# EAGLE board SparkFun-OpenPIR-NCS36000_PROTO_Panel_v01 (EAGLE 7.5.0)
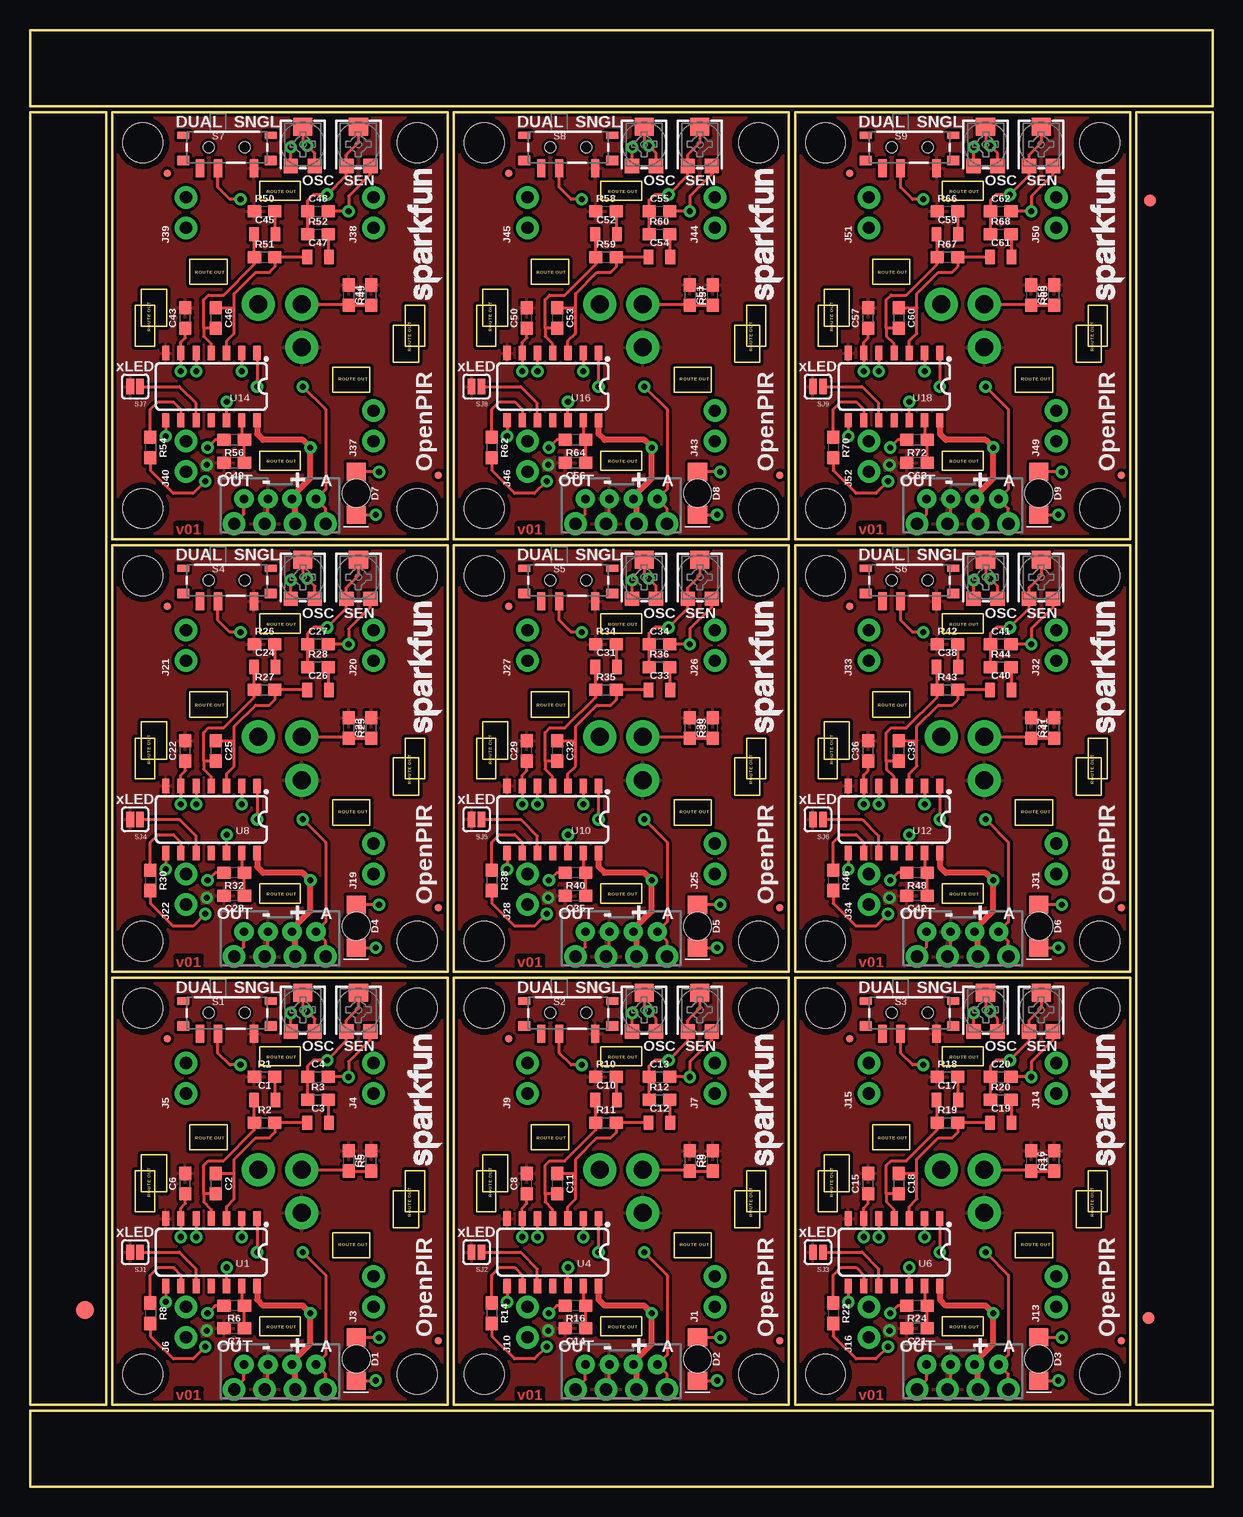
[diagram p0: board, top side]
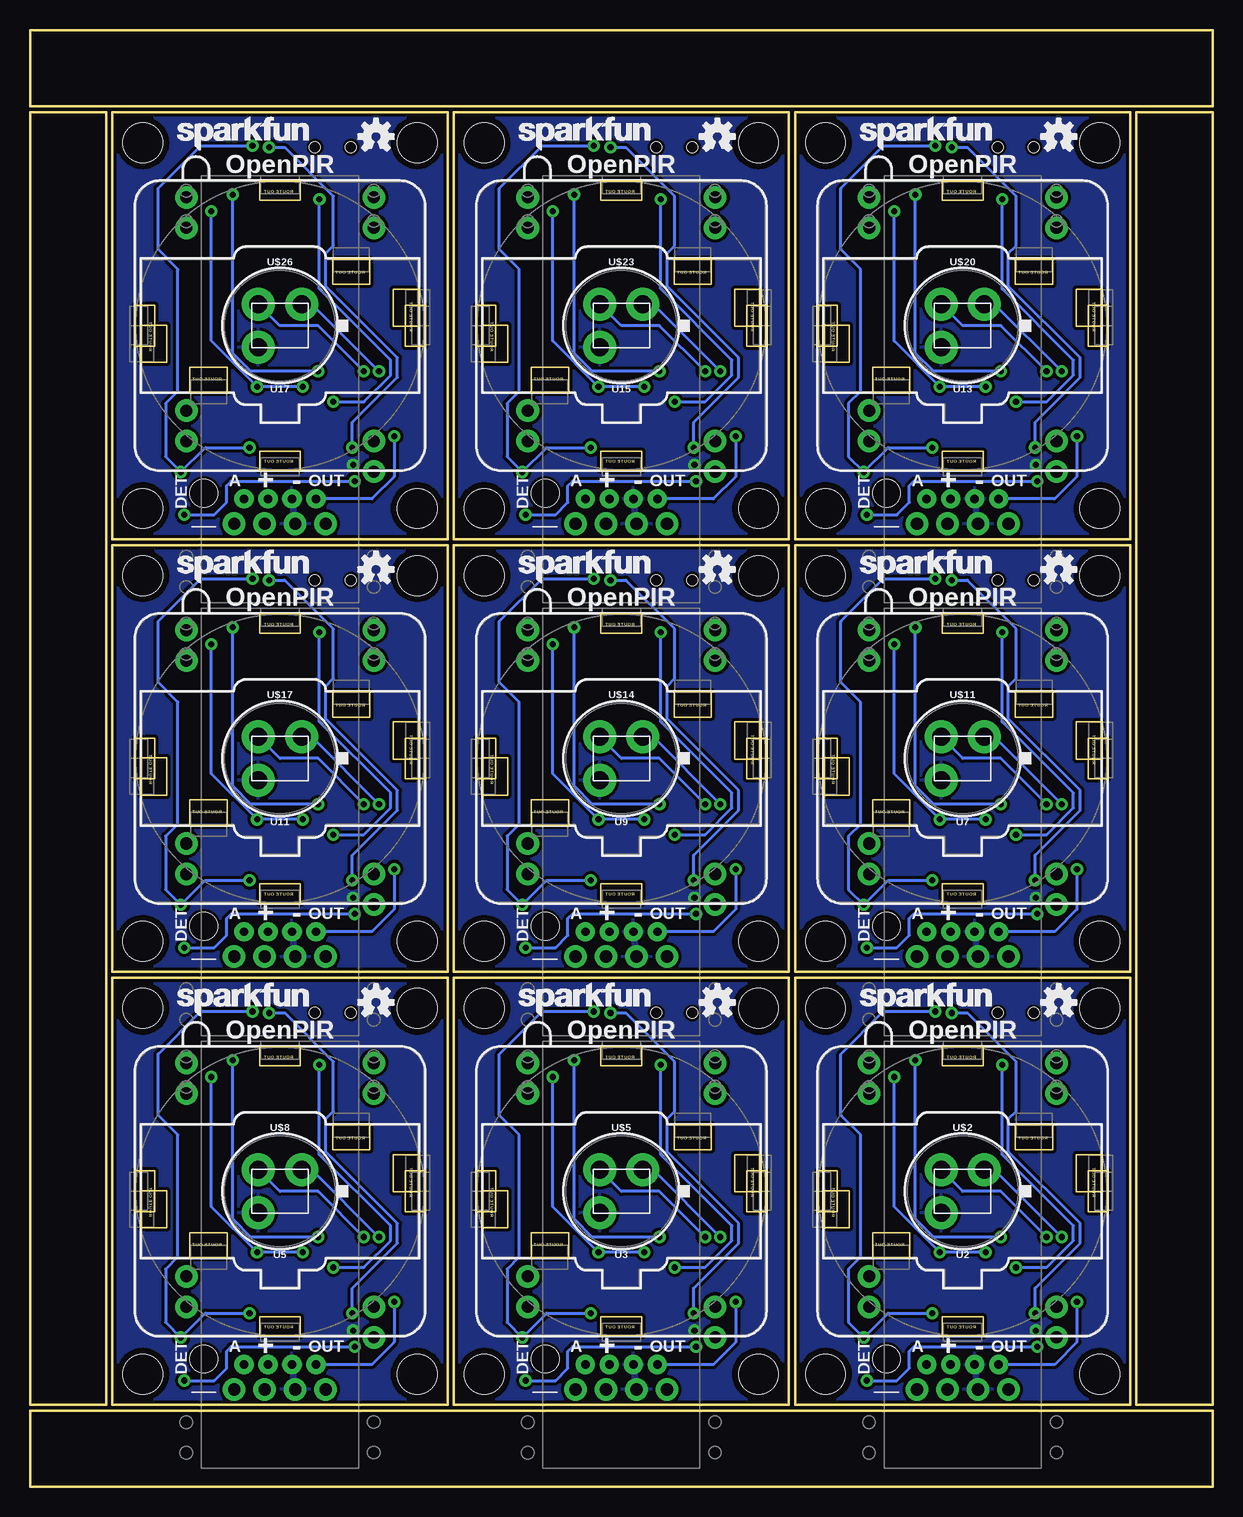
[diagram p1: board, bottom side, seen from below]

Size 98.55 x 121.41 mm. Coordinates in mm from the lower left corner, seen from the top.
Outline: 6.35,79.25 6.35,6.86 0,6.86 0,29.72
Outline: 0,27.18 0,114.55 6.35,114.55 6.35,76.71
Outline: 79.25,0 0,0 0,6.35 29.72,6.35
Outline: 27.18,6.35 98.55,6.35 98.55,0 76.71,0
Outline: 98.55,79.25 98.55,6.86 92.2,6.86 92.2,29.72
Outline: 92.2,27.18 92.2,114.55 98.55,114.55 98.55,76.71
Outline: 79.25,115.06 0,115.06 0,121.41 29.72,121.41
Outline: 27.18,121.41 98.55,121.41 98.55,115.06 76.71,115.06
Outline: 6.86,6.86 6.86,42.42 34.8,42.42 34.8,6.86 6.86,6.86
Outline: 35.31,6.86 35.31,42.42 63.25,42.42 63.25,6.86 35.31,6.86
Outline: 63.75,6.86 63.75,42.42 91.69,42.42 91.69,6.86 63.75,6.86
Outline: 6.86,42.93 6.86,78.49 34.8,78.49 34.8,42.93 6.86,42.93
Outline: 35.31,42.93 35.31,78.49 63.25,78.49 63.25,42.93 35.31,42.93
Outline: 63.75,42.93 63.75,78.49 91.69,78.49 91.69,42.93 63.75,42.93
Outline: 6.86,78.99 6.86,114.55 34.8,114.55 34.8,78.99 6.86,78.99
Outline: 35.31,78.99 35.31,114.55 63.25,114.55 63.25,78.99 35.31,78.99
Outline: 63.75,78.99 63.75,114.55 91.69,114.55 91.69,78.99 63.75,78.99
Copper layers (1*16): Top 0.035mm / dielectric 1.5mm / Bottom 0.035mm
Design rules "SparkFun-2-layer-STANDARD": minimum track width 10mil, minimum drill 20mil, track to track 10mil, track to pad 8mil, pad to pad 8mil, via to via 10mil, smd to smd 8mil, copper to edge 8mil, drill to drill 8mil, minimum pad ring 10mil, minimum via ring 10mil, stop-mask expansion 4mil, vias tented up to drill 25mil, thermal gap 10mil

## Footprints (pad centres in the part's own frame; a part is rotated, then mirrored left to right if it is on the bottom)
0805 = smd 0.8 x 1.2: 1 -0.9,0; 2 0.9,0
0603 = smd 1.1 x 1: 1 -0.85,0; 2 0.85,0
LED-1206-BOTTOM = smd 1.5 x 1.6: A -1.8,0; C 1.8,0 | hole 2.3: 0,0
FIDUCIAL-1.5X3 = smd 1.5 x 1.5: 1 0,0
FIDUCIAL-1X2 = smd 1 x 1: 1 0,0
MICRO-FIDUCIAL = smd 0.635 x 0.635: 1 0,0
STAND-OFF = hole 3.302: 0,0
1X02_NO_SILK = drill 1.016 pad 1.88: 1 0,0; 2 2.54,0
JST-4-PTH-VERT-NS = drill 0.7 pad 1.6: 1 -3,-0.55; 2 -1,-0.55; 3 1,-0.55; 4 3,-0.55
1X04_NO_SILK_ALL_ROUND = drill 1.016 pad 1.88: 1 0,0; 2 2.54,0; 3 5.08,0; 4 7.62,0
TRIMPOT-TC33X = smd 1.2 x 1.2: 1 -1,-1.8; 3 1,-1.8 | smd 1.6 x 1.5: 2 0,1.45
SWITCH-SPST-SMD-A = smd 0.7 x 1.5: 1 -2.25,-1.75; 2 -0.75,-1.75; 3 2.25,-1.75 | smd 1 x 0.6: GND1 -3.65,1; GND3 3.65,1 | smd 1 x 0.8: GND2 -3.65,-1.1; GND4 3.65,-1.1 | hole 0.9: -1.5,0; 1.5,0
SJ_2S = smd 0.635 x 1.27: 1 -0.412,0; 2 0.412,0
SO14 = smd 0.6 x 1.2: 1 -3.81,-2.8; 2 -2.54,-2.8; 3 -1.27,-2.8; 4 0,-2.8; 5 1.27,-2.8; 6 2.54,-2.8; 7 3.81,-2.8; 8 3.81,2.8; 9 2.54,2.8; 10 1.27,2.8; 11 0,2.8; 12 -1.27,2.8; 13 -2.54,2.8; 14 -3.81,2.8
PIR = drill 1.5 pad 2.75: D -1.8,-1.8; G 1.8,1.8; S 1.8,-1.8

## Placement (x,y rotation side)
C1  22uF  [0805]  19.56,32.26 0 top
C2  10nF  [0603]  15.49,25.27 270 top
C3  22uF  [0805]  24,30.35 0 top
C4  10nF  [0603]  24,34.16 0 top
C5  0.1uF  [0603]  28.45,27.18 90 top
C6  0.1uF  [0603]  12.95,25.27 90 top
C7  0.1uF  [0603]  17.02,13.21 180 top
C8  0.1uF  [0603]  41.4,25.27 90 top
C9  0.1uF  [0603]  56.9,27.18 90 top
C10  22uF  [0805]  48.01,32.26 0 top
C11  10nF  [0603]  43.94,25.27 270 top
C12  22uF  [0805]  52.45,30.35 0 top
C13  10nF  [0603]  52.45,34.16 0 top
C14  0.1uF  [0603]  45.47,13.21 180 top
C15  0.1uF  [0603]  69.85,25.27 90 top
C16  0.1uF  [0603]  85.34,27.18 90 top
C17  22uF  [0805]  76.45,32.26 0 top
C18  10nF  [0603]  72.39,25.27 270 top
C19  22uF  [0805]  80.9,30.35 0 top
C20  10nF  [0603]  80.9,34.16 0 top
C21  0.1uF  [0603]  73.91,13.21 180 top
C22  0.1uF  [0603]  12.95,61.34 90 top
C23  0.1uF  [0603]  28.45,63.25 90 top
C24  22uF  [0805]  19.56,68.33 0 top
C25  10nF  [0603]  15.49,61.34 270 top
C26  22uF  [0805]  24,66.42 0 top
C27  10nF  [0603]  24,70.23 0 top
C28  0.1uF  [0603]  17.02,49.28 180 top
C29  0.1uF  [0603]  41.4,61.34 90 top
C30  0.1uF  [0603]  56.9,63.25 90 top
C31  22uF  [0805]  48.01,68.33 0 top
C32  10nF  [0603]  43.94,61.34 270 top
C33  22uF  [0805]  52.45,66.42 0 top
C34  10nF  [0603]  52.45,70.23 0 top
C35  0.1uF  [0603]  45.47,49.28 180 top
C36  0.1uF  [0603]  69.85,61.34 90 top
C37  0.1uF  [0603]  85.34,63.25 90 top
C38  22uF  [0805]  76.45,68.33 0 top
C39  10nF  [0603]  72.39,61.34 270 top
C40  22uF  [0805]  80.9,66.42 0 top
C41  10nF  [0603]  80.9,70.23 0 top
C42  0.1uF  [0603]  73.91,49.28 180 top
C43  0.1uF  [0603]  12.95,97.41 90 top
C44  0.1uF  [0603]  28.45,99.31 90 top
C45  22uF  [0805]  19.56,104.39 0 top
C46  10nF  [0603]  15.49,97.41 270 top
C47  22uF  [0805]  24,102.49 0 top
C48  10nF  [0603]  24,106.3 0 top
C49  0.1uF  [0603]  17.02,85.34 180 top
C50  0.1uF  [0603]  41.4,97.41 90 top
C51  0.1uF  [0603]  56.9,99.31 90 top
C52  22uF  [0805]  48.01,104.39 0 top
C53  10nF  [0603]  43.94,97.41 270 top
C54  22uF  [0805]  52.45,102.49 0 top
C55  10nF  [0603]  52.45,106.3 0 top
C56  0.1uF  [0603]  45.47,85.34 180 top
C57  0.1uF  [0603]  69.85,97.41 90 top
C58  0.1uF  [0603]  85.34,99.31 90 top
C59  22uF  [0805]  76.45,104.39 0 top
C60  10nF  [0603]  72.39,97.41 270 top
C61  22uF  [0805]  80.9,102.49 0 top
C62  10nF  [0603]  80.9,106.3 0 top
C63  0.1uF  [0603]  73.91,85.34 180 top
D1  Green  [LED-1206-BOTTOM]  27.18,10.67 270 top
D2  Green  [LED-1206-BOTTOM]  55.63,10.67 270 top
D3  Green  [LED-1206-BOTTOM]  84.07,10.67 270 top
D4  Green  [LED-1206-BOTTOM]  27.18,46.74 270 top
D5  Green  [LED-1206-BOTTOM]  55.63,46.74 270 top
D6  Green  [LED-1206-BOTTOM]  84.07,46.74 270 top
D7  Green  [LED-1206-BOTTOM]  27.18,82.8 270 top
D8  Green  [LED-1206-BOTTOM]  55.63,82.8 270 top
D9  Green  [LED-1206-BOTTOM]  84.07,82.8 270 top
E$1  [FIDUCIAL-1.5X3]  4.57,14.73 0 top
E$6  [FIDUCIAL-1X2]  93.34,107.19 180 top
E$8  [FIDUCIAL-1X2]  93.22,14.1 90 top
FD1  FIDUCIALUFIDUCIAL  [MICRO-FIDUCIAL]  11.43,37.34 0 top
FD2  FIDUCIALUFIDUCIAL  [MICRO-FIDUCIAL]  34.04,12.19 0 top
FD3  FIDUCIALUFIDUCIAL  [MICRO-FIDUCIAL]  39.88,37.34 0 top
FD4  FIDUCIALUFIDUCIAL  [MICRO-FIDUCIAL]  62.48,12.19 0 top
FD5  FIDUCIALUFIDUCIAL  [MICRO-FIDUCIAL]  68.33,37.34 0 top
FD6  FIDUCIALUFIDUCIAL  [MICRO-FIDUCIAL]  90.93,12.19 0 top
FD7  FIDUCIALUFIDUCIAL  [MICRO-FIDUCIAL]  11.43,73.41 0 top
FD8  FIDUCIALUFIDUCIAL  [MICRO-FIDUCIAL]  34.04,48.26 0 top
FD9  FIDUCIALUFIDUCIAL  [MICRO-FIDUCIAL]  39.88,73.41 0 top
FD10  FIDUCIALUFIDUCIAL  [MICRO-FIDUCIAL]  62.48,48.26 0 top
FD11  FIDUCIALUFIDUCIAL  [MICRO-FIDUCIAL]  68.33,73.41 0 top
FD12  FIDUCIALUFIDUCIAL  [MICRO-FIDUCIAL]  90.93,48.26 0 top
FD13  FIDUCIALUFIDUCIAL  [MICRO-FIDUCIAL]  11.43,109.47 0 top
FD14  FIDUCIALUFIDUCIAL  [MICRO-FIDUCIAL]  34.04,84.33 0 top
FD15  FIDUCIALUFIDUCIAL  [MICRO-FIDUCIAL]  39.88,109.47 0 top
FD16  FIDUCIALUFIDUCIAL  [MICRO-FIDUCIAL]  62.48,84.33 0 top
FD17  FIDUCIALUFIDUCIAL  [MICRO-FIDUCIAL]  68.33,109.47 0 top
FD18  FIDUCIALUFIDUCIAL  [MICRO-FIDUCIAL]  90.93,84.33 0 top
H1  STAND-OFF  [STAND-OFF]  9.4,39.88 0 top
H2  STAND-OFF  [STAND-OFF]  32.26,39.88 0 top
H3  STAND-OFF  [STAND-OFF]  9.4,9.4 0 top
H4  STAND-OFF  [STAND-OFF]  32.26,9.4 0 top
H5  STAND-OFF  [STAND-OFF]  37.85,39.88 0 top
H6  STAND-OFF  [STAND-OFF]  60.71,39.88 0 top
H7  STAND-OFF  [STAND-OFF]  37.85,9.4 0 top
H8  STAND-OFF  [STAND-OFF]  60.71,9.4 0 top
H9  STAND-OFF  [STAND-OFF]  66.29,39.88 0 top
H10  STAND-OFF  [STAND-OFF]  89.15,39.88 0 top
H11  STAND-OFF  [STAND-OFF]  66.29,9.4 0 top
H12  STAND-OFF  [STAND-OFF]  89.15,9.4 0 top
H13  STAND-OFF  [STAND-OFF]  9.4,75.95 0 top
H14  STAND-OFF  [STAND-OFF]  32.26,75.95 0 top
H15  STAND-OFF  [STAND-OFF]  9.4,45.47 0 top
H16  STAND-OFF  [STAND-OFF]  32.26,45.47 0 top
H17  STAND-OFF  [STAND-OFF]  37.85,75.95 0 top
H18  STAND-OFF  [STAND-OFF]  60.71,75.95 0 top
H19  STAND-OFF  [STAND-OFF]  37.85,45.47 0 top
H20  STAND-OFF  [STAND-OFF]  60.71,45.47 0 top
H21  STAND-OFF  [STAND-OFF]  66.29,75.95 0 top
H22  STAND-OFF  [STAND-OFF]  89.15,75.95 0 top
H23  STAND-OFF  [STAND-OFF]  66.29,45.47 0 top
H24  STAND-OFF  [STAND-OFF]  89.15,45.47 0 top
H25  STAND-OFF  [STAND-OFF]  9.4,112.01 0 top
H26  STAND-OFF  [STAND-OFF]  32.26,112.01 0 top
H27  STAND-OFF  [STAND-OFF]  9.4,81.53 0 top
H28  STAND-OFF  [STAND-OFF]  32.26,81.53 0 top
H29  STAND-OFF  [STAND-OFF]  37.85,112.01 0 top
H30  STAND-OFF  [STAND-OFF]  60.71,112.01 0 top
H31  STAND-OFF  [STAND-OFF]  37.85,81.53 0 top
H32  STAND-OFF  [STAND-OFF]  60.71,81.53 0 top
H33  STAND-OFF  [STAND-OFF]  66.29,112.01 0 top
H34  STAND-OFF  [STAND-OFF]  89.15,112.01 0 top
H35  STAND-OFF  [STAND-OFF]  66.29,81.53 0 top
H36  STAND-OFF  [STAND-OFF]  89.15,81.53 0 top
J1  [1X02_NO_SILK]  57.07,15.01 90 top
J2  [JST-4-PTH-VERT-NS]  20.83,9.65 180 top
J3  [1X02_NO_SILK]  28.63,15.01 90 top
J4  [1X02_NO_SILK]  28.63,32.79 90 top
J5  [1X02_NO_SILK]  13,32.79 90 top
J6  [1X02_NO_SILK]  13,12.47 90 top
J7  [1X02_NO_SILK]  57.07,32.79 90 top
J8  [1X04_NO_SILK_ALL_ROUND]  24.64,8.13 180 top
J9  [1X02_NO_SILK]  41.45,32.79 90 top
J10  [1X02_NO_SILK]  41.45,12.47 90 top
J11  [1X04_NO_SILK_ALL_ROUND]  53.09,8.13 180 top
J12  [JST-4-PTH-VERT-NS]  49.28,9.65 180 top
J13  [1X02_NO_SILK]  85.52,15.01 90 top
J14  [1X02_NO_SILK]  85.52,32.79 90 top
J15  [1X02_NO_SILK]  69.9,32.79 90 top
J16  [1X02_NO_SILK]  69.9,12.47 90 top
J17  [1X04_NO_SILK_ALL_ROUND]  81.53,8.13 180 top
J18  [JST-4-PTH-VERT-NS]  77.72,9.65 180 top
J19  [1X02_NO_SILK]  28.63,51.08 90 top
J20  [1X02_NO_SILK]  28.63,68.86 90 top
J21  [1X02_NO_SILK]  13,68.86 90 top
J22  [1X02_NO_SILK]  13,48.54 90 top
J23  [1X04_NO_SILK_ALL_ROUND]  24.64,44.2 180 top
J24  [JST-4-PTH-VERT-NS]  20.83,45.72 180 top
J25  [1X02_NO_SILK]  57.07,51.08 90 top
J26  [1X02_NO_SILK]  57.07,68.86 90 top
J27  [1X02_NO_SILK]  41.45,68.86 90 top
J28  [1X02_NO_SILK]  41.45,48.54 90 top
J29  [1X04_NO_SILK_ALL_ROUND]  53.09,44.2 180 top
J30  [JST-4-PTH-VERT-NS]  49.28,45.72 180 top
J31  [1X02_NO_SILK]  85.52,51.08 90 top
J32  [1X02_NO_SILK]  85.52,68.86 90 top
J33  [1X02_NO_SILK]  69.9,68.86 90 top
J34  [1X02_NO_SILK]  69.9,48.54 90 top
J35  [1X04_NO_SILK_ALL_ROUND]  81.53,44.2 180 top
J36  [JST-4-PTH-VERT-NS]  77.72,45.72 180 top
J37  [1X02_NO_SILK]  28.63,87.15 90 top
J38  [1X02_NO_SILK]  28.63,104.93 90 top
J39  [1X02_NO_SILK]  13,104.93 90 top
J40  [1X02_NO_SILK]  13,84.61 90 top
J41  [1X04_NO_SILK_ALL_ROUND]  24.64,80.26 180 top
J42  [JST-4-PTH-VERT-NS]  20.83,81.79 180 top
J43  [1X02_NO_SILK]  57.07,87.15 90 top
J44  [1X02_NO_SILK]  57.07,104.93 90 top
J45  [1X02_NO_SILK]  41.45,104.93 90 top
J46  [1X02_NO_SILK]  41.45,84.61 90 top
J47  [1X04_NO_SILK_ALL_ROUND]  53.09,80.26 180 top
J48  [JST-4-PTH-VERT-NS]  49.28,81.79 180 top
J49  [1X02_NO_SILK]  85.52,87.15 90 top
J50  [1X02_NO_SILK]  85.52,104.93 90 top
J51  [1X02_NO_SILK]  69.9,104.93 90 top
J52  [1X02_NO_SILK]  69.9,84.61 90 top
J53  [1X04_NO_SILK_ALL_ROUND]  81.53,80.26 180 top
J54  [JST-4-PTH-VERT-NS]  77.72,81.79 180 top
LOGO1  SFE_LOGO_NAME.1_INCH  [SFE_LOGO_NAME_.1]  34.8,26.29 90 top
LOGO2  SFE_LOGO_NAME.1_INCH  [SFE_LOGO_NAME_.1]  63.25,26.29 90 top
LOGO3  SFE_LOGO_NAME.1_INCH  [SFE_LOGO_NAME_.1]  29.84,38.73 0 bottom
LOGO4  OSHW-LOGOS  [OSHW-LOGO-S]  12.83,40.39 0 bottom
LOGO5  SFE_LOGO_NAME.1_INCH  [SFE_LOGO_NAME_.1]  58.29,38.73 0 bottom
LOGO6  OSHW-LOGOS  [OSHW-LOGO-S]  41.27,40.39 0 bottom
LOGO7  SFE_LOGO_NAME.1_INCH  [SFE_LOGO_NAME_.1]  91.69,26.29 90 top
LOGO8  SFE_LOGO_NAME.1_INCH  [SFE_LOGO_NAME_.1]  86.74,38.73 0 bottom
LOGO9  OSHW-LOGOS  [OSHW-LOGO-S]  69.72,40.39 0 bottom
LOGO10  SFE_LOGO_NAME.1_INCH  [SFE_LOGO_NAME_.1]  34.8,62.36 90 top
LOGO11  SFE_LOGO_NAME.1_INCH  [SFE_LOGO_NAME_.1]  29.84,74.8 0 bottom
LOGO12  OSHW-LOGOS  [OSHW-LOGO-S]  12.83,76.45 0 bottom
LOGO13  SFE_LOGO_NAME.1_INCH  [SFE_LOGO_NAME_.1]  63.25,62.36 90 top
LOGO14  SFE_LOGO_NAME.1_INCH  [SFE_LOGO_NAME_.1]  58.29,74.8 0 bottom
LOGO15  OSHW-LOGOS  [OSHW-LOGO-S]  41.27,76.45 0 bottom
LOGO16  SFE_LOGO_NAME.1_INCH  [SFE_LOGO_NAME_.1]  91.69,62.36 90 top
LOGO17  SFE_LOGO_NAME.1_INCH  [SFE_LOGO_NAME_.1]  86.74,74.8 0 bottom
LOGO18  OSHW-LOGOS  [OSHW-LOGO-S]  69.72,76.45 0 bottom
LOGO19  SFE_LOGO_NAME.1_INCH  [SFE_LOGO_NAME_.1]  34.8,98.42 90 top
LOGO20  SFE_LOGO_NAME.1_INCH  [SFE_LOGO_NAME_.1]  29.84,110.87 0 bottom
LOGO21  OSHW-LOGOS  [OSHW-LOGO-S]  12.83,112.52 0 bottom
LOGO22  SFE_LOGO_NAME.1_INCH  [SFE_LOGO_NAME_.1]  63.25,98.42 90 top
LOGO23  SFE_LOGO_NAME.1_INCH  [SFE_LOGO_NAME_.1]  58.29,110.87 0 bottom
LOGO24  OSHW-LOGOS  [OSHW-LOGO-S]  41.27,112.52 0 bottom
LOGO25  SFE_LOGO_NAME.1_INCH  [SFE_LOGO_NAME_.1]  91.69,98.42 90 top
LOGO26  SFE_LOGO_NAME.1_INCH  [SFE_LOGO_NAME_.1]  86.74,110.87 0 bottom
LOGO27  OSHW-LOGOS  [OSHW-LOGO-S]  69.72,112.52 0 bottom
R1  10k  [0603]  19.56,34.16 0 top
R2  560k  [0603]  19.56,30.35 0 top
R3  10k  [0603]  24,32.26 0 top
R4  1M  [TRIMPOT-TC33X]  27.37,39.75 0 top
R5  43k  [0603]  26.54,27.18 270 top
R6  51k  [0603]  17.02,15.11 180 top
R7  1M  [TRIMPOT-TC33X]  22.73,39.75 0 top
R8  1k  [0603]  10.03,14.48 270 top
R9  43k  [0603]  54.99,27.18 270 top
R10  10k  [0603]  48.01,34.16 0 top
R11  560k  [0603]  48.01,30.35 0 top
R12  10k  [0603]  52.45,32.26 0 top
R13  1M  [TRIMPOT-TC33X]  55.82,39.75 0 top
R14  1k  [0603]  38.48,14.48 270 top
R15  1M  [TRIMPOT-TC33X]  51.18,39.75 0 top
R16  51k  [0603]  45.47,15.11 180 top
R17  43k  [0603]  83.44,27.18 270 top
R18  10k  [0603]  76.45,34.16 0 top
R19  560k  [0603]  76.45,30.35 0 top
R20  10k  [0603]  80.9,32.26 0 top
R21  1M  [TRIMPOT-TC33X]  84.26,39.75 0 top
R22  1k  [0603]  66.93,14.48 270 top
R23  1M  [TRIMPOT-TC33X]  79.63,39.75 0 top
R24  51k  [0603]  73.91,15.11 180 top
R25  43k  [0603]  26.54,63.25 270 top
R26  10k  [0603]  19.56,70.23 0 top
R27  560k  [0603]  19.56,66.42 0 top
R28  10k  [0603]  24,68.33 0 top
R29  1M  [TRIMPOT-TC33X]  27.37,75.82 0 top
R30  1k  [0603]  10.03,50.55 270 top
R31  1M  [TRIMPOT-TC33X]  22.73,75.82 0 top
R32  51k  [0603]  17.02,51.18 180 top
R33  43k  [0603]  54.99,63.25 270 top
R34  10k  [0603]  48.01,70.23 0 top
R35  560k  [0603]  48.01,66.42 0 top
R36  10k  [0603]  52.45,68.33 0 top
R37  1M  [TRIMPOT-TC33X]  55.82,75.82 0 top
R38  1k  [0603]  38.48,50.55 270 top
R39  1M  [TRIMPOT-TC33X]  51.18,75.82 0 top
R40  51k  [0603]  45.47,51.18 180 top
R41  43k  [0603]  83.44,63.25 270 top
R42  10k  [0603]  76.45,70.23 0 top
R43  560k  [0603]  76.45,66.42 0 top
R44  10k  [0603]  80.9,68.33 0 top
R45  1M  [TRIMPOT-TC33X]  84.26,75.82 0 top
R46  1k  [0603]  66.93,50.55 270 top
R47  1M  [TRIMPOT-TC33X]  79.63,75.82 0 top
R48  51k  [0603]  73.91,51.18 180 top
R49  43k  [0603]  26.54,99.31 270 top
R50  10k  [0603]  19.56,106.3 0 top
R51  560k  [0603]  19.56,102.49 0 top
R52  10k  [0603]  24,104.39 0 top
R53  1M  [TRIMPOT-TC33X]  27.37,111.89 0 top
R54  1k  [0603]  10.03,86.61 270 top
R55  1M  [TRIMPOT-TC33X]  22.73,111.89 0 top
R56  51k  [0603]  17.02,87.25 180 top
R57  43k  [0603]  54.99,99.31 270 top
R58  10k  [0603]  48.01,106.3 0 top
R59  560k  [0603]  48.01,102.49 0 top
R60  10k  [0603]  52.45,104.39 0 top
R61  1M  [TRIMPOT-TC33X]  55.82,111.89 0 top
R62  1k  [0603]  38.48,86.61 270 top
R63  1M  [TRIMPOT-TC33X]  51.18,111.89 0 top
R64  51k  [0603]  45.47,87.25 180 top
R65  43k  [0603]  83.44,99.31 270 top
R66  10k  [0603]  76.45,106.3 0 top
R67  560k  [0603]  76.45,102.49 0 top
R68  10k  [0603]  80.9,104.39 0 top
R69  1M  [TRIMPOT-TC33X]  84.26,111.89 0 top
R70  1k  [0603]  66.93,86.61 270 top
R71  1M  [TRIMPOT-TC33X]  79.63,111.89 0 top
R72  51k  [0603]  73.91,87.25 180 top
S1  [SWITCH-SPST-SMD-A]  16.41,39.5 0 top
S2  [SWITCH-SPST-SMD-A]  44.86,39.5 0 top
S3  [SWITCH-SPST-SMD-A]  73.3,39.5 0 top
S4  [SWITCH-SPST-SMD-A]  16.41,75.56 0 top
S5  [SWITCH-SPST-SMD-A]  44.86,75.56 0 top
S6  [SWITCH-SPST-SMD-A]  73.3,75.56 0 top
S7  [SWITCH-SPST-SMD-A]  16.41,111.63 0 top
S8  [SWITCH-SPST-SMD-A]  44.86,111.63 0 top
S9  [SWITCH-SPST-SMD-A]  73.3,111.63 0 top
SJ1  LED-EN  [SJ_2S]  8.76,19.56 180 top
SJ2  LED-EN  [SJ_2S]  37.21,19.56 180 top
SJ3  LED-EN  [SJ_2S]  65.66,19.56 180 top
SJ4  LED-EN  [SJ_2S]  8.76,55.63 180 top
SJ5  LED-EN  [SJ_2S]  37.21,55.63 180 top
SJ6  LED-EN  [SJ_2S]  65.66,55.63 180 top
SJ7  LED-EN  [SJ_2S]  8.76,91.69 180 top
SJ8  LED-EN  [SJ_2S]  37.21,91.69 180 top
SJ9  LED-EN  [SJ_2S]  65.66,91.69 180 top
U1  NCS36000  [SO14]  15.11,19.56 180 top
U2  PIR  [PIR]  20.83,24.64 180 bottom
U3  PIR  [PIR]  49.28,24.64 180 bottom
U4  NCS36000  [SO14]  43.56,19.56 180 top
U5  PIR  [PIR]  77.72,24.64 180 bottom
U6  NCS36000  [SO14]  72.01,19.56 180 top
U7  PIR  [PIR]  20.83,60.71 180 bottom
U8  NCS36000  [SO14]  15.11,55.63 180 top
U9  PIR  [PIR]  49.28,60.71 180 bottom
U10  NCS36000  [SO14]  43.56,55.63 180 top
U11  PIR  [PIR]  77.72,60.71 180 bottom
U12  NCS36000  [SO14]  72.01,55.63 180 top
U13  PIR  [PIR]  20.83,96.77 180 bottom
U14  NCS36000  [SO14]  15.11,91.69 180 top
U15  PIR  [PIR]  49.28,96.77 180 bottom
U16  NCS36000  [SO14]  43.56,91.69 180 top
U17  PIR  [PIR]  77.72,96.77 180 bottom
U18  NCS36000  [SO14]  72.01,91.69 180 top
U$1  CWM 0.5 GI V1  [LENS-CWM-0.5-GI-V1]  20.83,24.64 0 bottom
U$2  AA 0.9 GI T1  [LENS-AA-0.9-GI-T1]  20.83,24.64 0 bottom
U$3  NCL-11  [LENS-NCL-11]  20.83,24.64 0 bottom
U$4  CWM 0.5 GI V1  [LENS-CWM-0.5-GI-V1]  49.28,24.64 0 bottom
U$5  AA 0.9 GI T1  [LENS-AA-0.9-GI-T1]  49.28,24.64 0 bottom
U$6  NCL-11  [LENS-NCL-11]  49.28,24.64 0 bottom
U$7  CWM 0.5 GI V1  [LENS-CWM-0.5-GI-V1]  77.72,24.64 0 bottom
U$8  AA 0.9 GI T1  [LENS-AA-0.9-GI-T1]  77.72,24.64 0 bottom
U$9  NCL-11  [LENS-NCL-11]  77.72,24.64 0 bottom
U$10  CWM 0.5 GI V1  [LENS-CWM-0.5-GI-V1]  20.83,60.71 0 bottom
U$11  AA 0.9 GI T1  [LENS-AA-0.9-GI-T1]  20.83,60.71 0 bottom
U$12  NCL-11  [LENS-NCL-11]  20.83,60.71 0 bottom
U$13  CWM 0.5 GI V1  [LENS-CWM-0.5-GI-V1]  49.28,60.71 0 bottom
U$14  AA 0.9 GI T1  [LENS-AA-0.9-GI-T1]  49.28,60.71 0 bottom
U$15  NCL-11  [LENS-NCL-11]  49.28,60.71 0 bottom
U$16  CWM 0.5 GI V1  [LENS-CWM-0.5-GI-V1]  77.72,60.71 0 bottom
U$17  AA 0.9 GI T1  [LENS-AA-0.9-GI-T1]  77.72,60.71 0 bottom
U$18  NCL-11  [LENS-NCL-11]  77.72,60.71 0 bottom
U$19  CWM 0.5 GI V1  [LENS-CWM-0.5-GI-V1]  20.83,96.77 0 bottom
U$20  AA 0.9 GI T1  [LENS-AA-0.9-GI-T1]  20.83,96.77 0 bottom
U$21  NCL-11  [LENS-NCL-11]  20.83,96.77 0 bottom
U$22  CWM 0.5 GI V1  [LENS-CWM-0.5-GI-V1]  49.28,96.77 0 bottom
U$23  AA 0.9 GI T1  [LENS-AA-0.9-GI-T1]  49.28,96.77 0 bottom
U$24  NCL-11  [LENS-NCL-11]  49.28,96.77 0 bottom
U$25  CWM 0.5 GI V1  [LENS-CWM-0.5-GI-V1]  77.72,96.77 0 bottom
U$26  AA 0.9 GI T1  [LENS-AA-0.9-GI-T1]  77.72,96.77 0 bottom
U$27  NCL-11  [LENS-NCL-11]  77.72,96.77 0 bottom

## Library data of the parts
C1 C3 C10 C12 C17 C19 C24 C26 C31 C33 C38 C40 C45 C47 C52 C54 C59 C61 = SparkFun-Capacitors; PROD_ID: CAP-08402
C2 C4 C11 C13 C18 C20 C25 C27 C32 C34 C39 C41 C46 C48 C53 C55 C60 C62 = SparkFun-Capacitors; PROD_ID: CAP-00867
C5-C9 C14-C16 C21-C23 C28-C30 C35-C37 C42-C44 C49-C51 C56-C58 C63 = SparkFun-Capacitors; PROD_ID: CAP-00810
D1-D9 = SparkFun-LED; PROD_ID: DIO-11076
E$1 SJ1-SJ9 = SparkFun-Retired
E$6 E$8 FD1-FD18 LOGO1-LOGO27 = SparkFun-Aesthetics
H1-H36 = SparkFun-Electromechanical
J1 J3-J7 J9 J10 J13-J16 J19-J22 J25-J28 J31-J34 J37-J40 J43-J46 J49-J52 = SparkFun-Connectors
J2 J12 J18 J24 J30 J36 J42 J48 J54 U$1-U$27 = openPIR-temp
J8 J11 J17 J23 J29 J35 J41 J47 J53 = SparkFun-Connectors; PROD_ID: CONN-09696
R1 R3 R10 R12 R18 R20 R26 R28 R34 R36 R42 R44 R50 R52 R58 R60 R66 R68 = SparkFun-Resistors; PROD_ID: RES-00824
R2 R11 R19 R27 R35 R43 R51 R59 R67 = openPIR-temp; PROD_ID: RES-10301
R4 R7 R13 R15 R21 R23 R29 R31 R37 R39 R45 R47 R53 R55 R61 R63 R69 R71 = openPIR-temp; PROD_ID: RES-13431
R5 R9 R17 R25 R33 R41 R49 R57 R65 = SparkFun-Resistors; PROD_ID: RES-07858
R6 R16 R24 R32 R40 R48 R56 R64 R72 = openPIR-temp; PROD_ID: RES-08495
R8 R14 R22 R30 R38 R46 R54 R62 R70 = SparkFun-Resistors; PROD_ID: RES-07856
S1-S9 = SparkFun-Electromechanical; PROD_ID: SWCH-10651
U1 U4 U6 U8 U10 U12 U14 U16 U18 = openPIR-temp; PROD_ID: IC-13432
U2 U3 U5 U7 U9 U11 U13 U15 U17 = openPIR-temp; PROD_ID: IC-13430

## Nets
!LED_EN!: SJ1.1 U1.10
!LED_EN!1: SJ2.1 U4.10
!LED_EN!2: SJ3.1 U6.10
!LED_EN!3: SJ4.1 U8.10
!LED_EN!4: SJ5.1 U10.10
!LED_EN!5: SJ6.1 U12.10
!LED_EN!6: SJ7.1 U14.10
!LED_EN!7: SJ8.1 U16.10
!LED_EN!8: SJ9.1 U18.10
A_OUT: C4.2 J2.1 J8.1 R4.3 U1.1
A_OUT1: C13.2 J11.1 J12.1 R13.3 U4.1
A_OUT2: C20.2 J17.1 J18.1 R21.3 U6.1
A_OUT3: C27.2 J23.1 J24.1 R29.3 U8.1
A_OUT4: C34.2 J29.1 J30.1 R37.3 U10.1
A_OUT5: C41.2 J35.1 J36.1 R45.3 U12.1
A_OUT6: C48.2 J41.1 J42.1 R53.3 U14.1
A_OUT7: C55.2 J47.1 J48.1 R61.3 U16.1
A_OUT8: C62.2 J53.1 J54.1 R69.3 U18.1
GND: C5.2 C6.2 C7.2 J2.3 J8.3 R1.1 R5.1 S1.3 SJ1.2 U1.7 U2.G
GND1: C8.2 C9.2 C14.2 J11.3 J12.3 R9.1 R10.1 S2.3 SJ2.2 U3.G U4.7
GND2: C15.2 C16.2 C21.2 J17.3 J18.3 R17.1 R18.1 S3.3 SJ3.2 U5.G U6.7
GND3: C22.2 C23.2 C28.2 J23.3 J24.3 R25.1 R26.1 S4.3 SJ4.2 U7.G U8.7
GND4: C29.2 C30.2 C35.2 J29.3 J30.3 R33.1 R34.1 S5.3 SJ5.2 U9.G U10.7
GND5: C36.2 C37.2 C42.2 J35.3 J36.3 R41.1 R42.1 S6.3 SJ6.2 U11.G U12.7
GND6: C43.2 C44.2 C49.2 J41.3 J42.3 R49.1 R50.1 S7.3 SJ7.2 U13.G U14.7
GND7: C50.2 C51.2 C56.2 J47.3 J48.3 R57.1 R58.1 S8.3 SJ8.2 U15.G U16.7
GND8: C57.2 C58.2 C63.2 J53.3 J54.3 R65.1 R66.1 S9.3 SJ9.2 U17.G U18.7
LED: R8.1 U1.9
LED1: R14.1 U4.9
LED2: R22.1 U6.9
LED3: R30.1 U8.9
LED4: R38.1 U10.9
LED5: R46.1 U12.9
LED6: R54.1 U14.9
LED7: R62.1 U16.9
LED8: R70.1 U18.9
MODE: S1.2 U1.12
MODE1: S2.2 U4.12
MODE2: S3.2 U6.12
MODE3: S4.2 U8.12
MODE4: S5.2 U10.12
MODE5: S6.2 U12.12
MODE6: S7.2 U14.12
MODE7: S8.2 U16.12
MODE8: S9.2 U18.12
N$1: C5.1 R5.2 U1.5 U2.S
N$2: C6.1 U1.6 U2.D
N$3: C1.2 R1.2
N$4: C3.2 R3.2
N$5: C1.1 C2.2 R2.1 U1.4
N$6: C2.1 C3.1 R2.2 U1.3
N$7: C4.1 R3.1 R4.1 R4.2 U1.2
N$8: C7.1 R6.1 U1.13
N$9: D1.C R8.2
N$10: C8.1 U3.D U4.6
N$11: R6.2 R7.1
N$12: C9.1 R9.2 U3.S U4.5
N$13: C10.2 R10.2
N$14: C12.2 R12.2
N$15: C10.1 C11.2 R11.1 U4.4
N$16: C11.1 C12.1 R11.2 U4.3
N$17: C13.1 R12.1 R13.1 R13.2 U4.2
N$18: C14.1 R16.1 U4.13
N$19: D2.C R14.2
N$20: R15.1 R16.2
N$21: C15.1 U5.D U6.6
N$22: C16.1 R17.2 U5.S U6.5
N$23: C17.2 R18.2
N$24: C19.2 R20.2
N$25: C17.1 C18.2 R19.1 U6.4
N$26: C18.1 C19.1 R19.2 U6.3
N$27: C20.1 R20.1 R21.1 R21.2 U6.2
N$28: C21.1 R24.1 U6.13
N$29: D3.C R22.2
N$30: R23.1 R24.2
N$31: C22.1 U7.D U8.6
N$32: C23.1 R25.2 U7.S U8.5
N$33: C24.2 R26.2
N$34: C26.2 R28.2
N$35: C24.1 C25.2 R27.1 U8.4
N$36: C25.1 C26.1 R27.2 U8.3
N$37: C27.1 R28.1 R29.1 R29.2 U8.2
N$38: C28.1 R32.1 U8.13
N$39: D4.C R30.2
N$40: R31.1 R32.2
N$41: C29.1 U9.D U10.6
N$42: C30.1 R33.2 U9.S U10.5
N$43: C31.2 R34.2
N$44: C33.2 R36.2
N$45: C31.1 C32.2 R35.1 U10.4
N$46: C32.1 C33.1 R35.2 U10.3
N$47: C34.1 R36.1 R37.1 R37.2 U10.2
N$48: C35.1 R40.1 U10.13
N$49: D5.C R38.2
N$50: R39.1 R40.2
N$51: C36.1 U11.D U12.6
N$52: C37.1 R41.2 U11.S U12.5
N$53: C38.2 R42.2
N$54: C40.2 R44.2
N$55: C38.1 C39.2 R43.1 U12.4
N$56: C39.1 C40.1 R43.2 U12.3
N$57: C41.1 R44.1 R45.1 R45.2 U12.2
N$58: C42.1 R48.1 U12.13
N$59: D6.C R46.2
N$60: R47.1 R48.2
N$61: C43.1 U13.D U14.6
N$62: C44.1 R49.2 U13.S U14.5
N$63: C45.2 R50.2
N$64: C47.2 R52.2
N$65: C45.1 C46.2 R51.1 U14.4
N$66: C46.1 C47.1 R51.2 U14.3
N$67: C48.1 R52.1 R53.1 R53.2 U14.2
N$68: C49.1 R56.1 U14.13
N$69: D7.C R54.2
N$70: R55.1 R56.2
N$71: C50.1 U15.D U16.6
N$72: C51.1 R57.2 U15.S U16.5
N$73: C52.2 R58.2
N$74: C54.2 R60.2
N$75: C52.1 C53.2 R59.1 U16.4
N$76: C53.1 C54.1 R59.2 U16.3
N$77: C55.1 R60.1 R61.1 R61.2 U16.2
N$78: C56.1 R64.1 U16.13
N$79: D8.C R62.2
N$80: R63.1 R64.2
N$81: C57.1 U17.D U18.6
N$82: C58.1 R65.2 U17.S U18.5
N$83: C59.2 R66.2
N$84: C61.2 R68.2
N$85: C59.1 C60.2 R67.1 U18.4
N$86: C60.1 C61.1 R67.2 U18.3
N$87: C62.1 R68.1 R69.1 R69.2 U18.2
N$88: C63.1 R72.1 U18.13
N$89: D9.C R70.2
N$90: R71.1 R72.2
OUT: J2.4 J8.4 U1.8
OUT1: J11.4 J12.4 U4.8
OUT2: J17.4 J18.4 U6.8
OUT3: J23.4 J24.4 U8.8
OUT4: J29.4 J30.4 U10.8
OUT5: J35.4 J36.4 U12.8
OUT6: J41.4 J42.4 U14.8
OUT7: J47.4 J48.4 U16.8
OUT8: J53.4 J54.4 U18.8
VCC: D1.A J2.2 J8.2 R7.2 R7.3 U1.14
VCC1: D2.A J11.2 J12.2 R15.2 R15.3 U4.14
VCC2: D3.A J17.2 J18.2 R23.2 R23.3 U6.14
VCC3: D4.A J23.2 J24.2 R31.2 R31.3 U8.14
VCC4: D5.A J29.2 J30.2 R39.2 R39.3 U10.14
VCC5: D6.A J35.2 J36.2 R47.2 R47.3 U12.14
VCC6: D7.A J41.2 J42.2 R55.2 R55.3 U14.14
VCC7: D8.A J47.2 J48.2 R63.2 R63.3 U16.14
VCC8: D9.A J53.2 J54.2 R71.2 R71.3 U18.14

## Tracks (layer width: path | path; a pad name or v marks a point on that pad's centre or on a via)
!LED_EN!
  Top 0.254: SJ1.1 12.45,19.56 13.84,18.16 U1.10
!LED_EN!1
  Top 0.254: SJ2.1 40.89,19.56 42.29,18.16 U4.10
!LED_EN!2
  Top 0.254: SJ3.1 69.34,19.56 70.74,18.16 U6.10
!LED_EN!3
  Top 0.254: SJ4.1 12.45,55.63 13.84,54.23 U8.10
!LED_EN!4
  Top 0.254: SJ5.1 40.89,55.63 42.29,54.23 U10.10
!LED_EN!5
  Top 0.254: SJ6.1 69.34,55.63 70.74,54.23 U12.10
!LED_EN!6
  Top 0.254: SJ7.1 12.45,91.69 13.84,90.3 U14.10
!LED_EN!7
  Top 0.254: SJ8.1 40.89,91.69 42.29,90.3 U16.10
!LED_EN!8
  Top 0.254: SJ9.1 69.34,91.69 70.74,90.3 U18.10
A_OUT  (via drill 0.51)
  Top 0.254: U1.1 v18.92,19.56 | C4.2 v26.54,34.16 26.54,35.43 28.37,37.26 R4.3 | v22.73,19.56 24.64,17.65 24.64,11.01 J2.1 24.64,9.39 J8.1
  Bottom 0.254: v18.92,19.56 v22.73,19.56 26.54,23.37 v26.54,34.16
A_OUT1  (via drill 0.51)
  Top 0.254: U4.1 v47.37,19.56 | C13.2 v54.99,34.16 54.99,35.43 56.82,37.26 R13.3 | v51.18,19.56 53.09,17.65 53.09,11.01 J12.1 53.09,9.39 J11.1
  Bottom 0.254: v47.37,19.56 v51.18,19.56 54.99,23.37 v54.99,34.16
A_OUT2  (via drill 0.51)
  Top 0.254: U6.1 v75.82,19.56 | C20.2 v83.44,34.16 83.44,35.43 85.26,37.26 R21.3 | v79.63,19.56 81.53,17.65 81.53,11.01 J18.1 81.53,9.39 J17.1
  Bottom 0.254: v75.82,19.56 v79.63,19.56 83.44,23.37 v83.44,34.16
A_OUT3  (via drill 0.51)
  Top 0.254: U8.1 v18.92,55.63 | C27.2 v26.54,70.23 26.54,71.5 28.37,73.33 R29.3 | v22.73,55.63 24.64,53.72 24.64,47.08 J24.1 24.64,45.46 J23.1
  Bottom 0.254: v18.92,55.63 v22.73,55.63 26.54,59.44 v26.54,70.23
A_OUT4  (via drill 0.51)
  Top 0.254: U10.1 v47.37,55.63 | C34.2 v54.99,70.23 54.99,71.5 56.82,73.33 R37.3 | v51.18,55.63 53.09,53.72 53.09,47.08 J30.1 53.09,45.46 J29.1
  Bottom 0.254: v47.37,55.63 v51.18,55.63 54.99,59.44 v54.99,70.23
A_OUT5  (via drill 0.51)
  Top 0.254: U12.1 v75.82,55.63 | C41.2 v83.44,70.23 83.44,71.5 85.26,73.33 R45.3 | v79.63,55.63 81.53,53.72 81.53,47.08 J36.1 81.53,45.46 J35.1
  Bottom 0.254: v75.82,55.63 v79.63,55.63 83.44,59.44 v83.44,70.23
A_OUT6  (via drill 0.51)
  Top 0.254: U14.1 v18.92,91.69 | C48.2 v26.54,106.3 26.54,107.57 28.37,109.39 R53.3 | v22.73,91.69 24.64,89.79 24.64,83.15 J42.1 24.64,81.53 J41.1
  Bottom 0.254: v18.92,91.69 v22.73,91.69 26.54,95.5 v26.54,106.3
A_OUT7  (via drill 0.51)
  Top 0.254: U16.1 v47.37,91.69 | C55.2 v54.99,106.3 54.99,107.57 56.82,109.39 R61.3 | v51.18,91.69 53.09,89.79 53.09,83.15 J48.1 53.09,81.53 J47.1
  Bottom 0.254: v47.37,91.69 v51.18,91.69 54.99,95.5 v54.99,106.3
A_OUT8  (via drill 0.51)
  Top 0.254: U18.1 v75.82,91.69 | C62.2 v83.44,106.3 83.44,107.57 85.26,109.39 R69.3 | v79.63,91.69 81.53,89.79 81.53,83.15 J54.1 81.53,81.53 J53.1
  Bottom 0.254: v75.82,91.69 v79.63,91.69 83.44,95.5 v83.44,106.3
GND  (via drill 0.51)
  Top 0.254: J8.3 19.83,8.4 J2.3
  other vias: 14.73,13.03
  pour Bottom (isolate 0.254): 34.8,6.86 34.8,42.42 6.86,42.42 6.86,6.86
  pour Top (isolate 0.254): 6.86,6.86 6.86,42.42 34.8,42.42 34.8,6.86
GND1  (via drill 0.51)
  Top 0.254: J11.3 48.28,8.4 J12.3
  other vias: 43.18,13.03
  pour Bottom (isolate 0.254): 63.25,6.86 63.25,42.42 35.31,42.42 35.31,6.86
  pour Top (isolate 0.254): 35.31,6.86 35.31,42.42 63.25,42.42 63.25,6.86
GND2  (via drill 0.51)
  Top 0.254: J17.3 76.72,8.4 J18.3
  other vias: 71.63,13.03
  pour Bottom (isolate 0.254): 91.69,6.86 91.69,42.42 63.75,42.42 63.75,6.86
  pour Top (isolate 0.254): 63.75,6.86 63.75,42.42 91.69,42.42 91.69,6.86
GND3  (via drill 0.51)
  Top 0.254: J23.3 19.83,44.47 J24.3
  other vias: 14.73,49.1
  pour Bottom (isolate 0.254): 34.8,42.93 34.8,78.49 6.86,78.49 6.86,42.93
  pour Top (isolate 0.254): 6.86,42.93 6.86,78.49 34.8,78.49 34.8,42.93
GND4  (via drill 0.51)
  Top 0.254: J29.3 48.28,44.47 J30.3
  other vias: 43.18,49.1
  pour Bottom (isolate 0.254): 63.25,42.93 63.25,78.49 35.31,78.49 35.31,42.93
  pour Top (isolate 0.254): 35.31,42.93 35.31,78.49 63.25,78.49 63.25,42.93
GND5  (via drill 0.51)
  Top 0.254: J35.3 76.72,44.47 J36.3
  other vias: 71.63,49.1
  pour Bottom (isolate 0.254): 91.69,42.93 91.69,78.49 63.75,78.49 63.75,42.93
  pour Top (isolate 0.254): 63.75,42.93 63.75,78.49 91.69,78.49 91.69,42.93
GND6  (via drill 0.51)
  Top 0.254: J41.3 19.83,80.53 J42.3
  other vias: 14.73,85.17
  pour Bottom (isolate 0.254): 34.8,78.99 34.8,114.55 6.86,114.55 6.86,78.99
  pour Top (isolate 0.254): 6.86,78.99 6.86,114.55 34.8,114.55 34.8,78.99
GND7  (via drill 0.51)
  Top 0.254: J47.3 48.28,80.53 J48.3
  other vias: 43.18,85.17
  pour Bottom (isolate 0.254): 63.25,78.99 63.25,114.55 35.31,114.55 35.31,78.99
  pour Top (isolate 0.254): 35.31,78.99 35.31,114.55 63.25,114.55 63.25,78.99
GND8  (via drill 0.51)
  Top 0.254: J53.3 76.72,80.53 J54.3
  other vias: 71.63,85.17
  pour Bottom (isolate 0.254): 91.69,78.99 91.69,114.55 63.75,114.55 63.75,78.99
  pour Top (isolate 0.254): 63.75,78.99 63.75,114.55 91.69,114.55 91.69,78.99
LED
  Top 0.254: R8.1 10.03,17.65 10.67,18.29 11.94,18.29 12.57,17.65 U1.9
LED1
  Top 0.254: R14.1 38.48,17.65 39.12,18.29 40.39,18.29 41.02,17.65 U4.9
LED2
  Top 0.254: R22.1 66.93,17.65 67.56,18.29 68.83,18.29 69.47,17.65 U6.9
LED3
  Top 0.254: R30.1 10.03,53.72 10.67,54.36 11.94,54.36 12.57,53.72 U8.9
LED4
  Top 0.254: R38.1 38.48,53.72 39.12,54.36 40.39,54.36 41.02,53.72 U10.9
LED5
  Top 0.254: R46.1 66.93,53.72 67.56,54.36 68.83,54.36 69.47,53.72 U12.9
LED6
  Top 0.254: R54.1 10.03,89.79 10.67,90.42 11.94,90.42 12.57,89.79 U14.9
LED7
  Top 0.254: R62.1 38.48,89.79 39.12,90.42 40.39,90.42 41.02,89.79 U16.9
LED8
  Top 0.254: R70.1 66.93,89.79 67.56,90.42 68.83,90.42 69.47,89.79 U18.9
MODE  (via drill 0.51)
  Top 0.254: U1.12 v16.38,18.29 | S1.2 15.66,36.16 16.65,35.17 v17.54,35.17
  Bottom 0.254: v16.38,18.29 13.84,18.29 11.61,20.52 11.61,21.77 17.54,27.7 v17.54,35.17
MODE1  (via drill 0.51)
  Top 0.254: U4.12 v44.83,18.29 | S2.2 44.11,36.16 45.1,35.17 v45.99,35.17
  Bottom 0.254: v44.83,18.29 42.29,18.29 40.06,20.52 40.06,21.77 45.99,27.7 v45.99,35.17
MODE2  (via drill 0.51)
  Top 0.254: U6.12 v73.28,18.29 | S3.2 72.55,36.16 73.55,35.17 v74.43,35.17
  Bottom 0.254: v73.28,18.29 70.74,18.29 68.5,20.52 68.5,21.77 74.43,27.7 v74.43,35.17
MODE3  (via drill 0.51)
  Top 0.254: U8.12 v16.38,54.36 | S4.2 15.66,72.23 16.65,71.23 v17.54,71.23
  Bottom 0.254: v16.38,54.36 13.84,54.36 11.61,56.59 11.61,57.84 17.54,63.77 v17.54,71.23
MODE4  (via drill 0.51)
  Top 0.254: U10.12 v44.83,54.36 | S5.2 44.11,72.23 45.1,71.23 v45.99,71.23
  Bottom 0.254: v44.83,54.36 42.29,54.36 40.06,56.59 40.06,57.84 45.99,63.77 v45.99,71.23
MODE5  (via drill 0.51)
  Top 0.254: U12.12 v73.28,54.36 | S6.2 72.55,72.23 73.55,71.23 v74.43,71.23
  Bottom 0.254: v73.28,54.36 70.74,54.36 68.5,56.59 68.5,57.84 74.43,63.77 v74.43,71.23
MODE6  (via drill 0.51)
  Top 0.254: U14.12 v16.38,90.42 | S7.2 15.66,108.29 16.65,107.3 v17.54,107.3
  Bottom 0.254: v16.38,90.42 13.84,90.42 11.61,92.66 11.61,93.9 17.54,99.83 v17.54,107.3
MODE7  (via drill 0.51)
  Top 0.254: U16.12 v44.83,90.42 | S8.2 44.11,108.29 45.1,107.3 v45.99,107.3
  Bottom 0.254: v44.83,90.42 42.29,90.42 40.06,92.66 40.06,93.9 45.99,99.83 v45.99,107.3
MODE8  (via drill 0.51)
  Top 0.254: U18.12 v73.28,90.42 | S9.2 72.55,108.29 73.55,107.3 v74.43,107.3
  Bottom 0.254: v73.28,90.42 70.74,90.42 68.5,92.66 68.5,93.9 74.43,99.83 v74.43,107.3
N$1  (via drill 0.51)
  Top 0.254: U1.5 v13.84,20.83 | U2.S 26.54,26.44 R5.2 C5.1
  Bottom 0.254: v13.84,20.83 17.65,24.64 20.83,24.64 U2.S
N$2  (via drill 0.51)
  Top 0.254: v12.57,20.83 U1.6 12.57,23.24 12.95,23.62 C6.1
  Bottom 0.254: v12.57,20.83 18.18,26.44 U2.D
N$3
  Top 0.254: C1.2 20.46,34.11 R1.2
N$4
  Top 0.254: C3.2 24.9,32.21 R3.2
N$5
  Top 0.254: U1.4 15.11,23.11 14.48,23.75 14.48,24.42 | 14.48,24.42 14.48,26.8 14.86,27.18 16.13,27.18 18.71,29.76 R2.1 18.66,30.4 C1.1 | C2.2 14.48,24.42
N$6
  Top 0.254: U1.3 16.38,23.37 17.02,24 17.02,26.12 | 17.02,26.12 17.02,27.3 18.8,29.08 19.94,29.08 20.41,29.55 R2.2 C3.1 | C2.1 17.02,26.12
N$7  (via drill 0.51)
  Top 0.254: U1.2 v17.65,20.83 | R3.1 C4.1 23.15,35.09 23.62,35.56 v24.77,35.56 26.37,37.16 R4.1 26.37,38.88 27.37,39.88 R4.2
  Bottom 0.254: v17.65,20.83 23.24,20.83 24.77,22.35 v24.77,35.56
N$8
  Top 0.254: C7.1 R6.1 17.65,15.33 U1.13
N$9  (via drill 0.51)
  Top 0.254: R8.2 10.03,12.57 11.94,10.67 13.59,10.67 v14.61,11.68 | D1.C v28.81,8.87
  Bottom 0.254: v28.81,8.87 26.31,8.87 25.27,9.91 25.27,11.3 24.89,11.68 v14.61,11.68
N$10  (via drill 0.51)
  Top 0.254: v41.02,20.83 U4.6 41.02,23.24 41.4,23.62 C8.1
  Bottom 0.254: v41.02,20.83 46.63,26.44 U3.D
N$11  (via drill 0.51)
  Top 0.254: R6.2 15.43,15.11 v14.8,14.48 | R7.1 v21.73,39.5
  Bottom 0.254: v14.8,14.48 14.8,16.57 11.05,20.32 11.05,21.97 17.02,27.94 17.02,30.67 16.38,31.3 16.38,35.43 20.45,39.5 v21.73,39.5
N$12  (via drill 0.51)
  Top 0.254: U4.5 v42.29,20.83 | U3.S 54.99,26.44 R9.2 C9.1
  Bottom 0.254: v42.29,20.83 46.1,24.64 49.28,24.64 U3.S
N$13
  Top 0.254: C10.2 48.91,34.11 R10.2
N$14
  Top 0.254: C12.2 53.35,32.21 R12.2
N$15
  Top 0.254: U4.4 43.56,23.11 42.93,23.75 42.93,24.42 | 42.93,24.42 42.93,26.8 43.31,27.18 44.58,27.18 47.16,29.76 R11.1 47.11,30.4 C10.1 | C11.2 42.93,24.42
N$16
  Top 0.254: U4.3 44.83,23.37 45.47,24 45.47,26.12 | 45.47,26.12 45.47,27.3 47.24,29.08 48.39,29.08 48.86,29.55 R11.2 C12.1 | C11.1 45.47,26.12
N$17  (via drill 0.51)
  Top 0.254: U4.2 v46.1,20.83 | R12.1 C13.1 51.6,35.09 52.07,35.56 v53.21,35.56 54.82,37.16 R13.1 54.82,38.88 55.82,39.88 R13.2
  Bottom 0.254: v46.1,20.83 51.69,20.83 53.21,22.35 v53.21,35.56
N$18
  Top 0.254: C14.1 R16.1 46.1,15.33 U4.13
N$19  (via drill 0.51)
  Top 0.254: R14.2 38.48,12.57 40.39,10.67 42.04,10.67 v43.05,11.68 | D2.C v57.26,8.87
  Bottom 0.254: v57.26,8.87 54.76,8.87 53.72,9.91 53.72,11.3 53.34,11.68 v43.05,11.68
N$20  (via drill 0.51)
  Top 0.254: R16.2 43.88,15.11 v43.24,14.48 | R15.1 v50.18,39.5
  Bottom 0.254: v43.24,14.48 43.24,16.57 39.5,20.32 39.5,21.97 45.47,27.94 45.47,30.67 44.83,31.3 44.83,35.43 48.9,39.5 v50.18,39.5
N$21  (via drill 0.51)
  Top 0.254: v69.47,20.83 U6.6 69.47,23.24 69.85,23.62 C15.1
  Bottom 0.254: v69.47,20.83 75.08,26.44 U5.D
N$22  (via drill 0.51)
  Top 0.254: U6.5 v70.74,20.83 | U5.S 83.44,26.44 R17.2 C16.1
  Bottom 0.254: v70.74,20.83 74.55,24.64 77.72,24.64 U5.S
N$23
  Top 0.254: C17.2 77.35,34.11 R18.2
N$24
  Top 0.254: C19.2 81.8,32.21 R20.2
N$25
  Top 0.254: U6.4 72.01,23.11 71.37,23.75 71.37,24.42 | 71.37,24.42 71.37,26.8 71.75,27.18 73.03,27.18 75.6,29.76 R19.1 75.55,30.4 C17.1 | C18.2 71.37,24.42
N$26
  Top 0.254: U6.3 73.28,23.37 73.91,24 73.91,26.12 | 73.91,26.12 73.91,27.3 75.69,29.08 76.83,29.08 77.3,29.55 R19.2 C19.1 | C18.1 73.91,26.12
N$27  (via drill 0.51)
  Top 0.254: U6.2 v74.55,20.83 | R20.1 C20.1 80.05,35.09 80.52,35.56 v81.66,35.56 83.26,37.16 R21.1 83.26,38.88 84.26,39.88 R21.2
  Bottom 0.254: v74.55,20.83 80.14,20.83 81.66,22.35 v81.66,35.56
N$28
  Top 0.254: C21.1 R24.1 74.55,15.33 U6.13
N$29  (via drill 0.51)
  Top 0.254: R22.2 66.93,12.57 68.83,10.67 70.48,10.67 v71.5,11.68 | D3.C v85.7,8.87
  Bottom 0.254: v85.7,8.87 83.21,8.87 82.17,9.91 82.17,11.3 81.79,11.68 v71.5,11.68
N$30  (via drill 0.51)
  Top 0.254: R24.2 72.33,15.11 v71.69,14.48 | R23.1 v78.63,39.5
  Bottom 0.254: v71.69,14.48 71.69,16.57 67.94,20.32 67.94,21.97 73.91,27.94 73.91,30.67 73.28,31.3 73.28,35.43 77.34,39.5 v78.63,39.5
N$31  (via drill 0.51)
  Top 0.254: v12.57,56.9 U8.6 12.57,59.31 12.95,59.69 C22.1
  Bottom 0.254: v12.57,56.9 18.18,62.51 U7.D
N$32  (via drill 0.51)
  Top 0.254: U8.5 v13.84,56.9 | U7.S 26.54,62.51 R25.2 C23.1
  Bottom 0.254: v13.84,56.9 17.65,60.71 20.83,60.71 U7.S
N$33
  Top 0.254: C24.2 20.46,70.18 R26.2
N$34
  Top 0.254: C26.2 24.9,68.28 R28.2
N$35
  Top 0.254: U8.4 15.11,59.18 14.48,59.82 14.48,60.49 | 14.48,60.49 14.48,62.87 14.86,63.25 16.13,63.25 18.71,65.83 R27.1 18.66,66.47 C24.1 | C25.2 14.48,60.49
N$36
  Top 0.254: U8.3 16.38,59.44 17.02,60.07 17.02,62.19 | 17.02,62.19 17.02,63.37 18.8,65.15 19.94,65.15 20.41,65.62 R27.2 C26.1 | C25.1 17.02,62.19
N$37  (via drill 0.51)
  Top 0.254: U8.2 v17.65,56.9 | R28.1 C27.1 23.15,71.16 23.62,71.63 v24.77,71.63 26.37,73.23 R29.1 26.37,74.95 27.37,75.95 R29.2
  Bottom 0.254: v17.65,56.9 23.24,56.9 24.77,58.42 v24.77,71.63
N$38
  Top 0.254: C28.1 R32.1 17.65,51.4 U8.13
N$39  (via drill 0.51)
  Top 0.254: R30.2 10.03,48.64 11.94,46.74 13.59,46.74 v14.61,47.75 | D4.C v28.81,44.94
  Bottom 0.254: v28.81,44.94 26.31,44.94 25.27,45.97 25.27,47.37 24.89,47.75 v14.61,47.75
N$40  (via drill 0.51)
  Top 0.254: R32.2 15.43,51.18 v14.8,50.55 | R31.1 v21.73,75.56
  Bottom 0.254: v14.8,50.55 14.8,52.64 11.05,56.39 11.05,58.04 17.02,64.01 17.02,66.74 16.38,67.37 16.38,71.5 20.45,75.56 v21.73,75.56
N$41  (via drill 0.51)
  Top 0.254: v41.02,56.9 U10.6 41.02,59.31 41.4,59.69 C29.1
  Bottom 0.254: v41.02,56.9 46.63,62.51 U9.D
N$42  (via drill 0.51)
  Top 0.254: U10.5 v42.29,56.9 | U9.S 54.99,62.51 R33.2 C30.1
  Bottom 0.254: v42.29,56.9 46.1,60.71 49.28,60.71 U9.S
N$43
  Top 0.254: C31.2 48.91,70.18 R34.2
N$44
  Top 0.254: C33.2 53.35,68.28 R36.2
N$45
  Top 0.254: U10.4 43.56,59.18 42.93,59.82 42.93,60.49 | 42.93,60.49 42.93,62.87 43.31,63.25 44.58,63.25 47.16,65.83 R35.1 47.11,66.47 C31.1 | C32.2 42.93,60.49
N$46
  Top 0.254: U10.3 44.83,59.44 45.47,60.07 45.47,62.19 | 45.47,62.19 45.47,63.37 47.24,65.15 48.39,65.15 48.86,65.62 R35.2 C33.1 | C32.1 45.47,62.19
N$47  (via drill 0.51)
  Top 0.254: U10.2 v46.1,56.9 | R36.1 C34.1 51.6,71.16 52.07,71.63 v53.21,71.63 54.82,73.23 R37.1 54.82,74.95 55.82,75.95 R37.2
  Bottom 0.254: v46.1,56.9 51.69,56.9 53.21,58.42 v53.21,71.63
N$48
  Top 0.254: C35.1 R40.1 46.1,51.4 U10.13
N$49  (via drill 0.51)
  Top 0.254: R38.2 38.48,48.64 40.39,46.74 42.04,46.74 v43.05,47.75 | D5.C v57.26,44.94
  Bottom 0.254: v57.26,44.94 54.76,44.94 53.72,45.97 53.72,47.37 53.34,47.75 v43.05,47.75
N$50  (via drill 0.51)
  Top 0.254: R40.2 43.88,51.18 v43.24,50.55 | R39.1 v50.18,75.56
  Bottom 0.254: v43.24,50.55 43.24,52.64 39.5,56.39 39.5,58.04 45.47,64.01 45.47,66.74 44.83,67.37 44.83,71.5 48.9,75.56 v50.18,75.56
N$51  (via drill 0.51)
  Top 0.254: v69.47,56.9 U12.6 69.47,59.31 69.85,59.69 C36.1
  Bottom 0.254: v69.47,56.9 75.08,62.51 U11.D
N$52  (via drill 0.51)
  Top 0.254: U12.5 v70.74,56.9 | U11.S 83.44,62.51 R41.2 C37.1
  Bottom 0.254: v70.74,56.9 74.55,60.71 77.72,60.71 U11.S
N$53
  Top 0.254: C38.2 77.35,70.18 R42.2
N$54
  Top 0.254: C40.2 81.8,68.28 R44.2
N$55
  Top 0.254: U12.4 72.01,59.18 71.37,59.82 71.37,60.49 | 71.37,60.49 71.37,62.87 71.75,63.25 73.03,63.25 75.6,65.83 R43.1 75.55,66.47 C38.1 | C39.2 71.37,60.49
N$56
  Top 0.254: U12.3 73.28,59.44 73.91,60.07 73.91,62.19 | 73.91,62.19 73.91,63.37 75.69,65.15 76.83,65.15 77.3,65.62 R43.2 C40.1 | C39.1 73.91,62.19
N$57  (via drill 0.51)
  Top 0.254: U12.2 v74.55,56.9 | R44.1 C41.1 80.05,71.16 80.52,71.63 v81.66,71.63 83.26,73.23 R45.1 83.26,74.95 84.26,75.95 R45.2
  Bottom 0.254: v74.55,56.9 80.14,56.9 81.66,58.42 v81.66,71.63
N$58
  Top 0.254: C42.1 R48.1 74.55,51.4 U12.13
N$59  (via drill 0.51)
  Top 0.254: R46.2 66.93,48.64 68.83,46.74 70.48,46.74 v71.5,47.75 | D6.C v85.7,44.94
  Bottom 0.254: v85.7,44.94 83.21,44.94 82.17,45.97 82.17,47.37 81.79,47.75 v71.5,47.75
N$60  (via drill 0.51)
  Top 0.254: R48.2 72.33,51.18 v71.69,50.55 | R47.1 v78.63,75.56
  Bottom 0.254: v71.69,50.55 71.69,52.64 67.94,56.39 67.94,58.04 73.91,64.01 73.91,66.74 73.28,67.37 73.28,71.5 77.34,75.56 v78.63,75.56
N$61  (via drill 0.51)
  Top 0.254: v12.57,92.96 U14.6 12.57,95.38 12.95,95.76 C43.1
  Bottom 0.254: v12.57,92.96 18.18,98.57 U13.D
N$62  (via drill 0.51)
  Top 0.254: U14.5 v13.84,92.96 | U13.S 26.54,98.57 R49.2 C44.1
  Bottom 0.254: v13.84,92.96 17.65,96.77 20.83,96.77 U13.S
N$63
  Top 0.254: C45.2 20.46,106.25 R50.2
N$64
  Top 0.254: C47.2 24.9,104.34 R52.2
N$65
  Top 0.254: U14.4 15.11,95.25 14.48,95.89 14.48,96.56 | 14.48,96.56 14.48,98.93 14.86,99.31 16.13,99.31 18.71,101.89 R51.1 18.66,102.54 C45.1 | C46.2 14.48,96.56
N$66
  Top 0.254: U14.3 16.38,95.5 17.02,96.14 17.02,98.26 | 17.02,98.26 17.02,99.44 18.8,101.22 19.94,101.22 20.41,101.69 R51.2 C47.1 | C46.1 17.02,98.26
N$67  (via drill 0.51)
  Top 0.254: U14.2 v17.65,92.96 | R52.1 C48.1 23.15,107.23 23.62,107.7 v24.77,107.7 26.37,109.3 R53.1 26.37,111.01 27.37,112.01 R53.2
  Bottom 0.254: v17.65,92.96 23.24,92.96 24.77,94.49 v24.77,107.7
N$68
  Top 0.254: C49.1 R56.1 17.65,87.46 U14.13
N$69  (via drill 0.51)
  Top 0.254: R54.2 10.03,84.71 11.94,82.8 13.59,82.8 v14.61,83.82 | D7.C v28.81,81
  Bottom 0.254: v28.81,81 26.31,81 25.27,82.04 25.27,83.44 24.89,83.82 v14.61,83.82
N$70  (via drill 0.51)
  Top 0.254: R56.2 15.43,87.25 v14.8,86.61 | R55.1 v21.73,111.63
  Bottom 0.254: v14.8,86.61 14.8,88.71 11.05,92.46 11.05,94.11 17.02,100.08 17.02,102.81 16.38,103.44 16.38,107.57 20.45,111.63 v21.73,111.63
N$71  (via drill 0.51)
  Top 0.254: v41.02,92.96 U16.6 41.02,95.38 41.4,95.76 C50.1
  Bottom 0.254: v41.02,92.96 46.63,98.57 U15.D
N$72  (via drill 0.51)
  Top 0.254: U16.5 v42.29,92.96 | U15.S 54.99,98.57 R57.2 C51.1
  Bottom 0.254: v42.29,92.96 46.1,96.77 49.28,96.77 U15.S
N$73
  Top 0.254: C52.2 48.91,106.25 R58.2
N$74
  Top 0.254: C54.2 53.35,104.34 R60.2
N$75
  Top 0.254: U16.4 43.56,95.25 42.93,95.89 42.93,96.56 | 42.93,96.56 42.93,98.93 43.31,99.31 44.58,99.31 47.16,101.89 R59.1 47.11,102.54 C52.1 | C53.2 42.93,96.56
N$76
  Top 0.254: U16.3 44.83,95.5 45.47,96.14 45.47,98.26 | 45.47,98.26 45.47,99.44 47.24,101.22 48.39,101.22 48.86,101.69 R59.2 C54.1 | C53.1 45.47,98.26
N$77  (via drill 0.51)
  Top 0.254: U16.2 v46.1,92.96 | R60.1 C55.1 51.6,107.23 52.07,107.7 v53.21,107.7 54.82,109.3 R61.1 54.82,111.01 55.82,112.01 R61.2
  Bottom 0.254: v46.1,92.96 51.69,92.96 53.21,94.49 v53.21,107.7
N$78
  Top 0.254: C56.1 R64.1 46.1,87.46 U16.13
N$79  (via drill 0.51)
  Top 0.254: R62.2 38.48,84.71 40.39,82.8 42.04,82.8 v43.05,83.82 | D8.C v57.26,81
  Bottom 0.254: v57.26,81 54.76,81 53.72,82.04 53.72,83.44 53.34,83.82 v43.05,83.82
N$80  (via drill 0.51)
  Top 0.254: R64.2 43.88,87.25 v43.24,86.61 | R63.1 v50.18,111.63
  Bottom 0.254: v43.24,86.61 43.24,88.71 39.5,92.46 39.5,94.11 45.47,100.08 45.47,102.81 44.83,103.44 44.83,107.57 48.9,111.63 v50.18,111.63
N$81  (via drill 0.51)
  Top 0.254: v69.47,92.96 U18.6 69.47,95.38 69.85,95.76 C57.1
  Bottom 0.254: v69.47,92.96 75.08,98.57 U17.D
N$82  (via drill 0.51)
  Top 0.254: U18.5 v70.74,92.96 | U17.S 83.44,98.57 R65.2 C58.1
  Bottom 0.254: v70.74,92.96 74.55,96.77 77.72,96.77 U17.S
N$83
  Top 0.254: C59.2 77.35,106.25 R66.2
N$84
  Top 0.254: C61.2 81.8,104.34 R68.2
N$85
  Top 0.254: U18.4 72.01,95.25 71.37,95.89 71.37,96.56 | 71.37,96.56 71.37,98.93 71.75,99.31 73.03,99.31 75.6,101.89 R67.1 75.55,102.54 C59.1 | C60.2 71.37,96.56
N$86
  Top 0.254: U18.3 73.28,95.5 73.91,96.14 73.91,98.26 | 73.91,98.26 73.91,99.44 75.69,101.22 76.83,101.22 77.3,101.69 R67.2 C61.1 | C60.1 73.91,98.26
N$87  (via drill 0.51)
  Top 0.254: U18.2 v74.55,92.96 | R68.1 C62.1 80.05,107.23 80.52,107.7 v81.66,107.7 83.26,109.3 R69.1 83.26,111.01 84.26,112.01 R69.2
  Bottom 0.254: v74.55,92.96 80.14,92.96 81.66,94.49 v81.66,107.7
N$88
  Top 0.254: C63.1 R72.1 74.55,87.46 U18.13
N$89  (via drill 0.51)
  Top 0.254: R70.2 66.93,84.71 68.83,82.8 70.48,82.8 v71.5,83.82 | D9.C v85.7,81
  Bottom 0.254: v85.7,81 83.21,81 82.17,82.04 82.17,83.44 81.79,83.82 v71.5,83.82
N$90  (via drill 0.51)
  Top 0.254: R72.2 72.33,87.25 v71.69,86.61 | R71.1 v78.63,111.63
  Bottom 0.254: v71.69,86.61 71.69,88.71 67.94,92.46 67.94,94.11 73.91,100.08 73.91,102.81 73.28,103.44 73.28,107.57 77.34,111.63 v78.63,111.63
OUT  (via drill 0.51)
  Top 0.254: U1.8 v11.3,15.42 | J8.4 17.83,8.94 J2.4
  Bottom 0.254: v11.3,15.42 11.3,12.06 13.17,10.2 J2.4
OUT1  (via drill 0.51)
  Top 0.254: U4.8 v39.75,15.42 | J11.4 46.28,8.94 J12.4
  Bottom 0.254: v39.75,15.42 39.75,12.06 41.61,10.2 J12.4
OUT2  (via drill 0.51)
  Top 0.254: U6.8 v68.2,15.42 | J17.4 74.72,8.94 J18.4
  Bottom 0.254: v68.2,15.42 68.2,12.06 70.06,10.2 J18.4
OUT3  (via drill 0.51)
  Top 0.254: U8.8 v11.3,51.49 | J23.4 17.83,45.01 J24.4
  Bottom 0.254: v11.3,51.49 11.3,48.13 13.17,46.27 J24.4
OUT4  (via drill 0.51)
  Top 0.254: U10.8 v39.75,51.49 | J29.4 46.28,45.01 J30.4
  Bottom 0.254: v39.75,51.49 39.75,48.13 41.61,46.27 J30.4
OUT5  (via drill 0.51)
  Top 0.254: U12.8 v68.2,51.49 | J35.4 74.72,45.01 J36.4
  Bottom 0.254: v68.2,51.49 68.2,48.13 70.06,46.27 J36.4
OUT6  (via drill 0.51)
  Top 0.254: U14.8 v11.3,87.55 | J41.4 17.83,81.07 J42.4
  Bottom 0.254: v11.3,87.55 11.3,84.2 13.17,82.34 J42.4
OUT7  (via drill 0.51)
  Top 0.254: U16.8 v39.75,87.55 | J47.4 46.28,81.07 J48.4
  Bottom 0.254: v39.75,87.55 39.75,84.2 41.61,82.34 J48.4
OUT8  (via drill 0.51)
  Top 0.254: U18.8 v68.2,87.55 | J53.4 74.72,81.07 J54.4
  Bottom 0.254: v68.2,87.55 68.2,84.2 70.06,82.34 J54.4
VCC  (via drill 0.51)
  Top 0.254: R7.2 22.73,40.01 v23.11,39.62 23.73,39.01 R7.3 | v29.08,12.45 27.2,12.45 D1.A
  Top 0.508: U1.14 18.92,15.62 19.43,15.11 22.73,15.11 v23.37,14.48 23.37,11.94 21.83,10.4 J2.2 22.1,9.93 J8.2
  Bottom 0.254: v23.11,39.62 27.43,39.62 30.99,36.07 30.99,30.99 29.34,29.34 29.34,19.18 30.35,18.16 30.35,13.72 v29.08,12.45 27.05,14.48 v23.37,14.48
VCC1  (via drill 0.51)
  Top 0.254: R15.2 51.18,40.01 v51.56,39.62 52.18,39.01 R15.3 | v57.53,12.45 55.65,12.45 D2.A
  Top 0.508: U4.14 47.37,15.62 47.88,15.11 51.18,15.11 v51.82,14.48 51.82,11.94 50.28,10.4 J12.2 50.55,9.93 J11.2
  Bottom 0.254: v51.56,39.62 55.88,39.62 59.44,36.07 59.44,30.99 57.78,29.34 57.78,19.18 58.8,18.16 58.8,13.72 v57.53,12.45 55.5,14.48 v51.82,14.48
VCC2  (via drill 0.51)
  Top 0.254: R23.2 79.63,40.01 v80.01,39.62 80.63,39.01 R23.3 | v85.98,12.45 84.1,12.45 D3.A
  Top 0.508: U6.14 75.82,15.62 76.33,15.11 79.63,15.11 v80.26,14.48 80.26,11.94 78.72,10.4 J18.2 78.99,9.93 J17.2
  Bottom 0.254: v80.01,39.62 84.33,39.62 87.88,36.07 87.88,30.99 86.23,29.34 86.23,19.18 87.25,18.16 87.25,13.72 v85.98,12.45 83.95,14.48 v80.26,14.48
VCC3  (via drill 0.51)
  Top 0.254: R31.2 22.73,76.07 v23.11,75.69 23.73,75.07 R31.3 | v29.08,48.51 27.2,48.51 D4.A
  Top 0.508: U8.14 18.92,51.69 19.43,51.18 22.73,51.18 v23.37,50.55 23.37,48.01 21.83,46.47 J24.2 22.1,46 J23.2
  Bottom 0.254: v23.11,75.69 27.43,75.69 30.99,72.14 30.99,67.06 29.34,65.41 29.34,55.24 30.35,54.23 30.35,49.78 v29.08,48.51 27.05,50.55 v23.37,50.55
VCC4  (via drill 0.51)
  Top 0.254: R39.2 51.18,76.07 v51.56,75.69 52.18,75.07 R39.3 | v57.53,48.51 55.65,48.51 D5.A
  Top 0.508: U10.14 47.37,51.69 47.88,51.18 51.18,51.18 v51.82,50.55 51.82,48.01 50.28,46.47 J30.2 50.55,46 J29.2
  Bottom 0.254: v51.56,75.69 55.88,75.69 59.44,72.14 59.44,67.06 57.78,65.41 57.78,55.24 58.8,54.23 58.8,49.78 v57.53,48.51 55.5,50.55 v51.82,50.55
VCC5  (via drill 0.51)
  Top 0.254: R47.2 79.63,76.07 v80.01,75.69 80.63,75.07 R47.3 | v85.98,48.51 84.1,48.51 D6.A
  Top 0.508: U12.14 75.82,51.69 76.33,51.18 79.63,51.18 v80.26,50.55 80.26,48.01 78.72,46.47 J36.2 78.99,46 J35.2
  Bottom 0.254: v80.01,75.69 84.33,75.69 87.88,72.14 87.88,67.06 86.23,65.41 86.23,55.24 87.25,54.23 87.25,49.78 v85.98,48.51 83.95,50.55 v80.26,50.55
VCC6  (via drill 0.51)
  Top 0.254: R55.2 22.73,112.14 v23.11,111.76 23.73,111.14 R55.3 | v29.08,84.58 27.2,84.58 D7.A
  Top 0.508: U14.14 18.92,87.76 19.43,87.25 22.73,87.25 v23.37,86.61 23.37,84.07 21.83,82.53 J42.2 22.1,82.07 J41.2
  Bottom 0.254: v23.11,111.76 27.43,111.76 30.99,108.2 30.99,103.12 29.34,101.47 29.34,91.31 30.35,90.3 30.35,85.85 v29.08,84.58 27.05,86.61 v23.37,86.61
VCC7  (via drill 0.51)
  Top 0.254: R63.2 51.18,112.14 v51.56,111.76 52.18,111.14 R63.3 | v57.53,84.58 55.65,84.58 D8.A
  Top 0.508: U16.14 47.37,87.76 47.88,87.25 51.18,87.25 v51.82,86.61 51.82,84.07 50.28,82.53 J48.2 50.55,82.07 J47.2
  Bottom 0.254: v51.56,111.76 55.88,111.76 59.44,108.2 59.44,103.12 57.78,101.47 57.78,91.31 58.8,90.3 58.8,85.85 v57.53,84.58 55.5,86.61 v51.82,86.61
VCC8  (via drill 0.51)
  Top 0.254: R71.2 79.63,112.14 v80.01,111.76 80.63,111.14 R71.3 | v85.98,84.58 84.1,84.58 D9.A
  Top 0.508: U18.14 75.82,87.76 76.33,87.25 79.63,87.25 v80.26,86.61 80.26,84.07 78.72,82.53 J54.2 78.99,82.07 J53.2
  Bottom 0.254: v80.01,111.76 84.33,111.76 87.88,108.2 87.88,103.12 86.23,101.47 86.23,91.31 87.25,90.3 87.25,85.85 v85.98,84.58 83.95,86.61 v80.26,86.61

## Text on the board
Top: v01 | v01 | v01 | v01 | v01 | v01 | v01 | v01 | v01
Dimension: ROUTE OUT | ROUTE OUT | ROUTE OUT | ROUTE OUT | ROUTE OUT | ROUTE OUT | ROUTE OUT | ROUTE OUT | ROUTE OUT | ROUTE OUT | ROUTE OUT | ROUTE OUT | ROUTE OUT | ROUTE OUT | ROUTE OUT | ROUTE OUT | ROUTE OUT | ROUTE OUT | ROUTE OUT | ROUTE OUT | ROUTE OUT | ROUTE OUT | ROUTE OUT | ROUTE OUT | ROUTE OUT | ROUTE OUT | ROUTE OUT | ROUTE OUT | ROUTE OUT | ROUTE OUT | ROUTE OUT | ROUTE OUT | ROUTE OUT | ROUTE OUT | ROUTE OUT | ROUTE OUT | ROUTE OUT | ROUTE OUT | ROUTE OUT | ROUTE OUT | ROUTE OUT | ROUTE OUT | ROUTE OUT | ROUTE OUT | ROUTE OUT | ROUTE OUT | ROUTE OUT | ROUTE OUT | ROUTE OUT | ROUTE OUT | ROUTE OUT | ROUTE OUT | ROUTE OUT | ROUTE OUT
tPlace: DUAL | SNGL | DUAL | SNGL | DUAL | SNGL | OSC | SEN | OSC | SEN | OSC | SEN | xLED | OpenPIR | xLED | OpenPIR | xLED | OpenPIR | OUT | - | + | A | OUT | - | + | A | OUT | - | + | A | DUAL | SNGL | DUAL | SNGL | DUAL | SNGL | OSC | SEN | OSC | SEN | OSC | SEN | xLED | OpenPIR | xLED | OpenPIR | xLED | OpenPIR | OUT | - | + | A | OUT | - | + | A | OUT | - | + | A | DUAL | SNGL | DUAL | SNGL | DUAL | SNGL | OSC | SEN | OSC | SEN | OSC | SEN | xLED | OpenPIR | xLED | OpenPIR | xLED | OpenPIR | OUT | - | + | A | OUT | - | + | A | OUT | - | + | A
bPlace: OpenPIR | OpenPIR | OpenPIR | OUT | - | + | A | DET | OUT | - | + | A | DET | OUT | - | + | A | DET | OpenPIR | OpenPIR | OpenPIR | OUT | - | + | A | DET | OUT | - | + | A | DET | OUT | - | + | A | DET | OpenPIR | OpenPIR | OpenPIR | OUT | - | + | A | DET | OUT | - | + | A | DET | OUT | - | + | A | DET